# Altium PCB LED7SEG_1.PcbDoc
Units mil, origin at the board's own origin, x right, y up, seen from the top; angles counter-clockwise.
Board outline 820 x 2400 mil, 2 copper layers (Top Layer, Bottom Layer); 18 components, 41 nets, 102 pads, 29 vias.
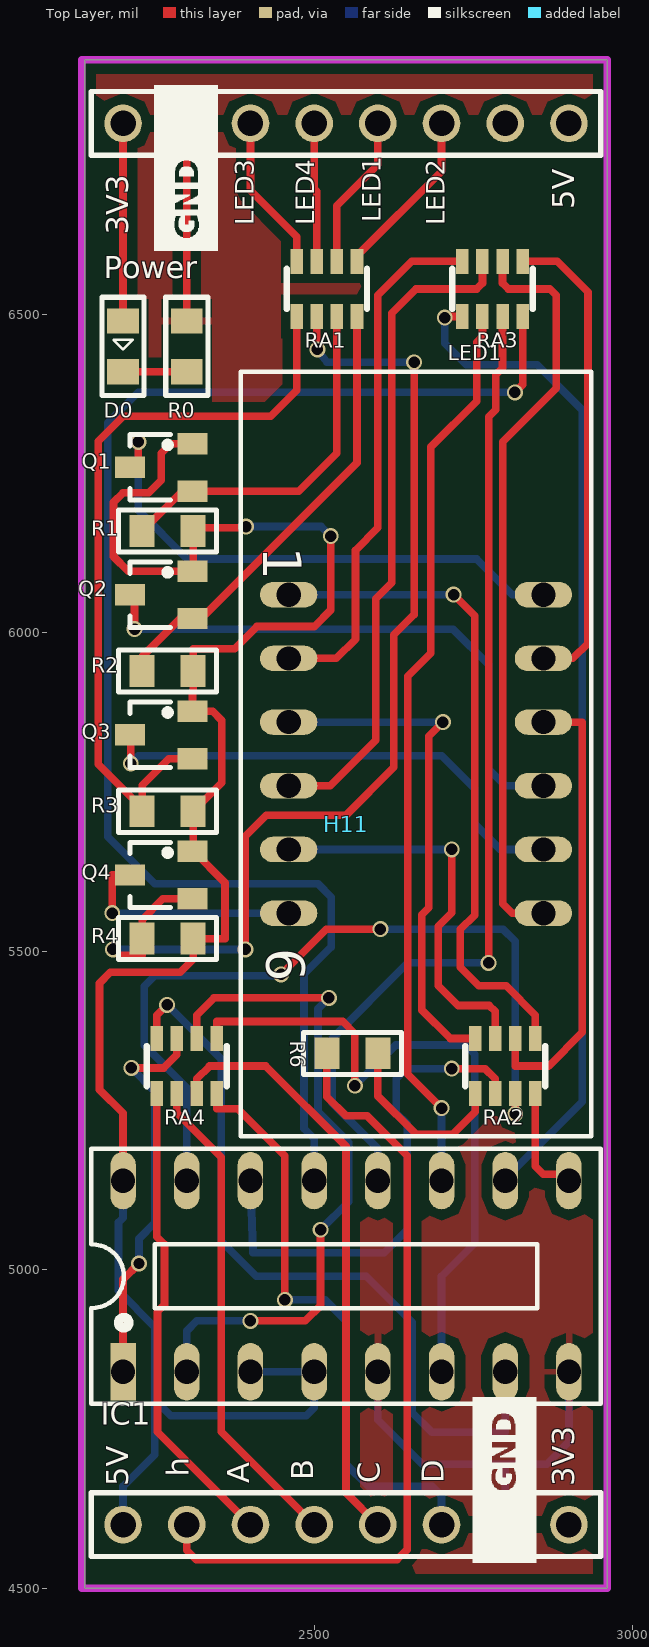
[diagram p0: Top Layer view]
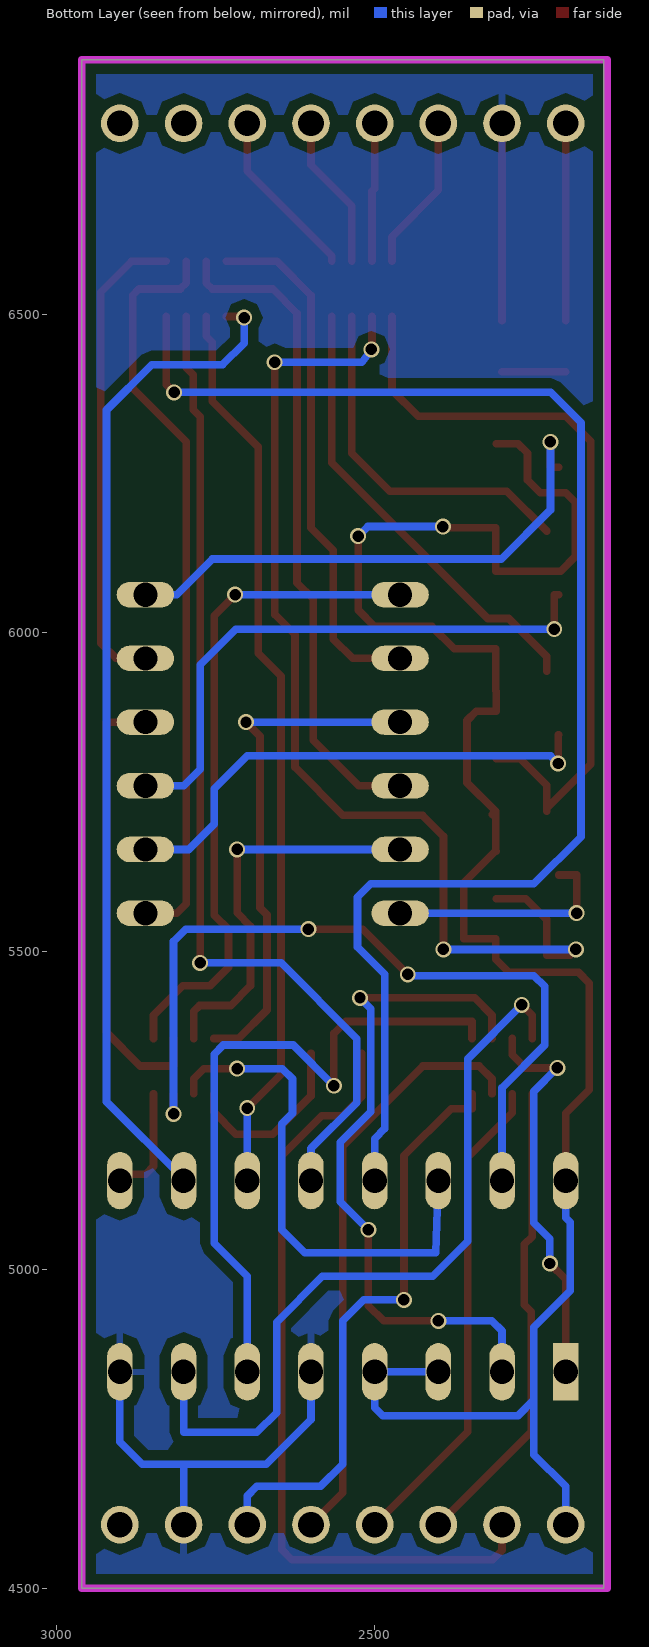
[diagram p1: Bottom Layer view, seen from below]
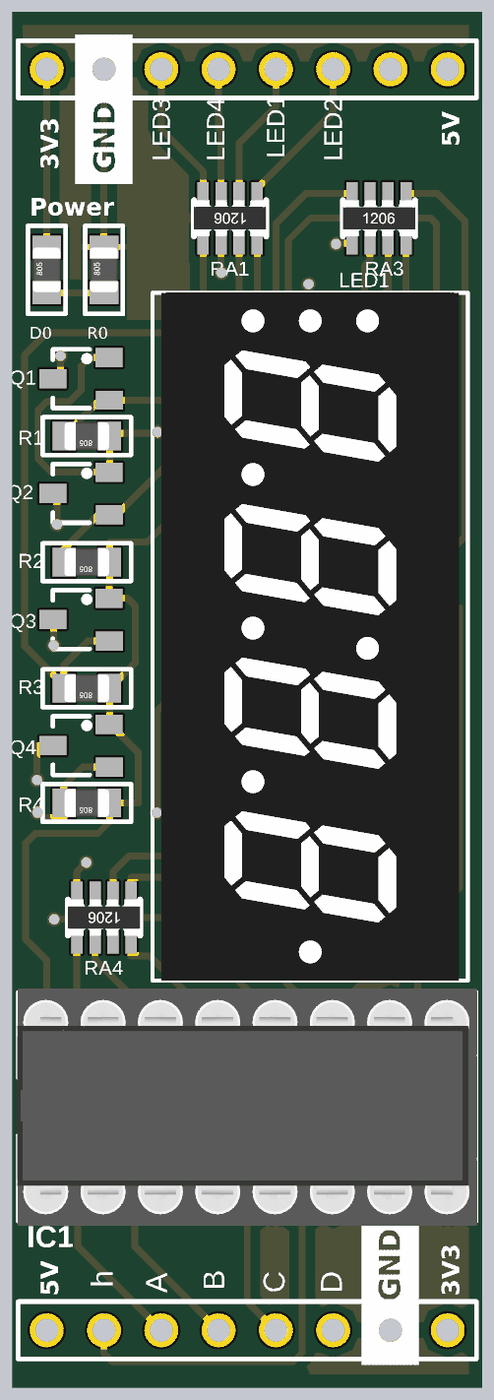
[diagram p2: 3D render of the assembled board from above, using the file's embedded part models]

## Layer stack, top to bottom
Top Layer: signal copper 1.4
Dielectric: dielectric 12.6, FR-4, Dk 4.8
Bottom Layer: signal copper 1.4

## Board outline
2140,4500 2140,6900 2960,6900 2960,4500

## Design rules (kind name [scope] priority, off if disabled: settings)
Clearance [InPolygon] p1: gap=15
Clearance Clearance_1 [All] p2: gap=10
PolygonConnect [All] p1: connectstyle=Relief reliefconductorwidth=10 reliefentries=4 polygonreliefangle="90 Angle"
RoutingVias [All] p1: holewidth=25 width=40 viastyle="Through Hole" minholewidth=28 minwidth=50 maxholewidth=28 maxwidth=50
SilkscreenOverComponentPads SilkToSolderMaskClearance [IsPad] p1: minsilkscreentomaskgap=10
SolderMaskExpansion [All] p1: expansion=4
Width [All] p1: maxlimit=12 minlimit=12 preferedwidth=12
27 further rules are at their usual default settings.

## Components (designator, comment, footprint, x,y, rotation, side; value= is the part's Value field where it differs from the comment)
D0 "LED3" SMD0805LED 2200,6450 r270 top
H11 "MBoard1_BH_DualPorts" MBoard1_BH_DualPorts 2200,6800 r0 top
IC1 "7447" DIP16/W0.3 2200,4840 r0 top
LED1 "LED7SEGx4A" LED7SEGx4A 2460,6060 r270 top
Q1 "A1015" SOT23B 2260,6260 r90 top
Q2 "A1015" SOT23B 2260,6060 r90 top
Q3 "A1015" SOT23B 2260,5840 r90 top
Q4 "A1015" SOT23B 2260,5620 r90 top
R0 "R" SMD0805R 2300,6450 r270 top
R1 "R" SMD0805R 2270,6160 r0 top
R2 "R" SMD0805R 2270,5940 r0 top
R3 "R" SMD0805R 2270,5720 r0 top
R4 "R" SMD0805R 2270,5520 r0 top
R6 "R" SMD0805R 2560,5340 r180 top
RA1 "1k" RA4 2520,6540 r180 top
RA2 "1K" RA4 2800,5320 r0 top
RA3 "1K" RA4 2780,6540 r0 top
RA4 "220" RA4 2300,5320 r180 top

## Footprints (in the part's own frame and the unit in brackets; to place one, negate y for a bottom-side part, rotate by r counter-clockwise, add the part's x,y. Pads: shape width x height; smd on the part's side, far side on the other; paste and mask are expansions set on the pad)
DIP16/W0.3 [mil] "16 PIN, W 300mil, Pin to pin 100mil"
  rect 40x90 hole 38: 1(0,0)
  oval 40x90 hole 38: 2(100,0) 3(200,0) 4(300,0) 5(400,0) 6(500,0) 7(600,0) 8(700,0) 9(700,300) 10(600,300) 11(500,300) 12(400,300) 13(300,300) 14(200,300) 15(100,300) 16(0,300)
  silkscreen extent -50,-50 750,350, body extent -52,-57 752,356, height 299
LED7SEGx4A [mil] "DIP 12 Leads; Body 32x 15 mm; Pitch 0.5 mm"
  oval 40x90 hole 38: 1(0,0) 2(100,0) 3(200,0) 4(300,0) 5(400,0) 6(500,0) 7(500,400) 8(400,400) 9(300,400) 10(200,400) 11(100,400) 12(0,400)
  silkscreen extent -350,-75 850,475, body extent -351,-60 850,460, height 532
MBoard1_BH_DualPorts [mm]
  round 1.5 hole 1.02: 1(0,0) 2(2.54,0) 3(5.08,0) 4(7.62,0) 5(10.16,0) 6(12.7,0) 7(15.24,0) 8(17.78,0) 9(17.78,-55.88) 10(15.24,-55.88) 11(12.7,-55.88) 12(10.16,-55.88) 13(7.62,-55.88) 14(5.08,-55.88) 15(2.54,-55.88) 16(0,-55.88)
  silkscreen extent -1.27,-57.15 19.05,1.27, body extent -1.27,-57.15 19.05,1.27, height 8
RA4 [mm] "Resistor Array (0603x4) form TME"
  rect 0.5x1 smd: 1(-1.2,-1.1) 2(-1.2,1.1) 3(-0.4,-1.1) 4(-0.4,1.1) 5(0.4,-1.1) 6(0.4,1.1) 7(1.2,-1.1) 8(1.2,1.1)
  silkscreen extent -1.6,-0.8 1.6,0.8, body extent -1.6,-0.8 1.6,0.8, height 0.5
SMD0805LED [mil] "Chip LED, Body 2.0 x 1.3 mm (LxW typ)"
  rect 39.37x50 smd: 1(-40,0) 2(40,0)
  silkscreen extent -77,-33 77,33, body extent -39,-25 39,25, height 31
SMD0805R [mil] "Chip Resistor; Body 2.0 x 1.3 mm (LxW typ)"
  rect 39.37x50 smd: 1(-40,0) 2(40,0)
  silkscreen extent -77,-33 77,33, body extent -39,-25 39,25, height 31
SOT23B [mm] "SOT 23B"
  rect 0.85x1.2 smd: 1(0.94,-1.245) 2(0,1.25) 3(-0.95,-1.25)
  silkscreen extent -1.3,-0.38 1.3,1.25, body extent -1.3,-0.38 1.3,1.25, height 1.27

## Part data
D0: library part LEDSMD, "LED SMD"
IC1: "BCD to 7-Segment Decoder/Driver"
LED1: "0.36''"
Q1 Q2 Q3 Q4: "PNP 600mW, ECB"
R0 R1 R2 R3 R4 R6: "RES_08"
RA1 RA2 RA3 RA4: library part RA4

## Via types
v1: diameter 25, hole 18, Top Layer to Bottom Layer, tented both sides, 29 vias

## Nets (pads, with @x,y where several pads share a name; then routed paths per layer and width w, separated by ;. In a path a pad name is that pad's centre, name@x,y a point inside that pad or via, vN(x,y) a via of type N, cw(c..) or ccw(c..) an arc to the next point about the centre after c; other vN are vias at no path point)
3V3: D0.1 H11.1 | length 310
  Top Layer w12: D0.1 H11.1
5V: H11.16 IC1.3 IC1.4 IC1.16 Q1.1 Q2.1 Q3.1 Q4.1 R1.2 R2.2 R3.2 R4.2 | length 3175
  Top Layer w12: IC1.16 2200,5246 2163,5283 2163,5450 2180,5467 2289.5,5467 2310,5487.5 R4.2 2360,5520 2360,5608 Q4.1@2310,5658 ; Q4.1 Q4.1@2310,5658 ; Q1.1 2275,6297 2260,6282 2260,6240 2240,6220 2200,6220 2185,6205 2185,6120 2208,6097 Q2.1 2310,6097 R1.2 2310,6165 2391,6165 v1(2393,6167) ; R3.2@2315,5715 R3.2 ; v1(2526,6152) 2526,6036 2500,6010 2410,6010 2375,5975 2310,5975 R2.2 2310,5909 2309,5908 Q3.1 2340.5,5877 2355,5862.5 2355,5765 R3.2 ; Q4.1@2310,5658 R3.2
  Bottom Layer w12: H11.16 2200,4660 2250,4710 2250,4796 ; IC1.16 2200,5082.09 2192.91,5075 2192.91,4967.09 2250,4910 2250,4796 ; v1(2393,6167) 2511,6167 v1(2526,6152) ; IC1.3 IC1.4 2500,4783.5 2487.5,4771 2275,4771 2250,4796
GND: H11.2 H11.10 IC1.5 IC1.8 R0.1 | length 933.5
  Top Layer w12: R0.1 H11.2
  Bottom Layer w12: IC1.5 2600,4765 2670,4695 2800,4695 ; H11.10 2800,4695 ; IC1.8 2900,4730 2865,4695 2800,4695
NetD0_2: D0.2 R0.2 | length 100
  Top Layer w12: D0.2 R0.2
NetH11_3: H11.3 RA1.7 | length 246.8
  Top Layer w12: H11.3 2400,6695 2472.76,6622.24 RA1.7
NetH11_4: H11.4 RA1.5 | length 218.5
  Top Layer w12: H11.4 2500,6697.5 2504.25,6693.25 RA1.5
NetH11_5: H11.5 RA1.3 | length 243.3
  Top Layer w12: RA1.3 2535.75,6670.75 2600,6735 H11.5
NetH11_6: H11.6 RA1.1 | length 271.7
  Top Layer w12: RA1.1 2567.24,6592.24 2700,6725 H11.6
NetH11_11: H11.11 RA4.2 | length 937.5
  Top Layer w12: RA4.2 2347.24,5253 2380,5253 2454,5179 v1(2454,4953)
  Bottom Layer w12: v1(2454,4953) 2517,4953 2550,4920 2550,4695 2585,4660 2685,4660 2700,4645 H11.11
NetH11_12: H11.12 RA4.4 | length 932.9
  Top Layer w12: RA4.4 2315.75,5300 2335.75,5320 2424.25,5320 2550,5194.25 2550,4650 H11.12
NetH11_13: H11.13 RA4.6 | length 766.1
  Top Layer w12: RA4.6 2284.25,5246.75 2354,5177 2354,4746 H11.13
NetH11_14: H11.14 RA4.8 | length 746.8
  Top Layer w12: RA4.8 2252.76,5052.24 2265,5040 2265,4945 2254,4934 2254,4746 H11.14
NetH11_15: H11.15 R6.2 | length 1249.4
  Top Layer w12: H11.15 2300,4560 2315,4545 2630,4545 2646,4561 2646,5179 2583,5242 2550,5242 2520,5272 R6.2
NetIC1_1: IC1.1 RA4.5 | length 618.6
  Top Layer w12: IC1.1 2200,4985 v1(2225,5010) ; v1(2213,5317) 2263.75,5317 2284.25,5337.5 RA4.5
  Bottom Layer w12: v1(2213,5317) 2250,5280 2250,5074 2225,5049 v1(2225,5010)
NetIC1_2: IC1.2 RA4.3 | length 1074
  Top Layer w12: RA4.3 2315.75,5400 2342.85,5427.1 v1(2523,5427.1) ; v1(2400,4920) 2486,4920 2510,4944 v1(2510,5063)
  Bottom Layer w12: IC1.2 2300,4904 2316,4920 v1(2400,4920) ; v1(2510,5063) 2554,5107 2554,5200 2506,5248 2506,5410.1 v1(2523,5427.1)
NetIC1_6: IC1.6 RA4.1 | length 1073.9
  Top Layer w12: RA4.1 2347.24,5390 2545,5390 2564,5371 v1(2564,5289)
  Bottom Layer w12: v1(2564,5289) 2628,5353 2737.5,5353 2752,5338.5 2752,5042 2700,4990 IC1.6
NetIC1_7: IC1.7 RA4.7 | length 1214.1
  Top Layer w12: RA4.7 2252.76,5399.67 v1(2269.08,5416)
  Bottom Layer w12: v1(2269.08,5416) 2354,5331.08 2354,5045 2409,4990 2582,4990 2654,4918 2654,4776 2685,4745 2800,4745 IC1.7
NetIC1_9: IC1.9 RA2.7 | length 182.1
  Top Layer w12: RA2.7 2847.24,5162.5 2859.74,5150 2900,5150 IC1.9
NetIC1_10: IC1.10 RA3.1 | length 1588.1
  Top Layer w12: v1(2705,6495) 2706.69,6496.69 RA3.1
  Bottom Layer w12: v1(2705,6495) 2705,6455 2739,6421 2850,6421 2921,6350 2921,5264.03 2800,5143.03 IC1.10
NetIC1_11: IC1.11 RA3.3 | length 1427.2
  Top Layer w12: v1(2700,5254) 2647,5307 2647,5932 2683,5968 2683,6291.89 2755,6363.89 2755,6456.55 2764.25,6465.8 RA3.3
  Bottom Layer w12: IC1.11 v1(2700,5254)
NetIC1_12: IC1.12 RA3.5 | length 1571.8
  Top Layer w12: v1(2774,5482) 2774,6339.25 2785,6350.25 2785,6405.34 2795.75,6416.09 RA3.5
  Bottom Layer w12: IC1.12 2600,5190.5 2528,5262.5 2528,5363 2647,5482 v1(2774,5482)
NetIC1_13: IC1.13 RA3.7 | length 2292.6
  Top Layer w12: v1(2815,6377.76) 2827.24,6390 RA3.7
  Bottom Layer w12: IC1.13 2500,5206 2484,5222 2484,5464 2527,5507 2527,5585 2506,5606 2250,5606 2176,5680 2176,6330 2223.76,6377.76 v1(2815,6377.76)
NetIC1_14: IC1.14 RA2.3 | length 805.8
  Top Layer w12: v1(2716,5316) 2768.25,5316 2784.25,5300 RA2.3
  Bottom Layer w12: IC1.14 2404,5027 2610,5027 2646,5063 2646,5229 2629,5246 2629,5300 2645,5316 v1(2716,5316)
NetIC1_15: IC1.15 RA2.5 | length 1263.2
  Top Layer w12: v1(2448,5464) 2519,5535 v1(2604,5535) ; v1(2815.75,5245) RA2.5
  Bottom Layer w12: IC1.15 2300,5286 2233,5353 2233,5445 2250,5462 2446,5462 v1(2448,5464) ; v1(2604,5535) 2796.5,5535 2815.75,5515.75 v1(2815.75,5245)
NetLED1_1: LED1.1 RA2.8 | length 1052.5
  Top Layer w12: v1(2719,6060) 2752,6027 2752,5557 2729.5,5534.5 2729.5,5475 2758.5,5446 2801.24,5446 2847.24,5400 RA2.8
  Bottom Layer w12: LED1.1 v1(2719,6060)
NetLED1_2: LED1.2 RA3.2 | length 826.5
  Top Layer w12: LED1.2 2534.6,5960 2565,5990.4 2565,6130 2600,6165 2600,6530 2653.31,6583.31 RA3.2
NetLED1_3: LED1.3 RA2.2 | length 809.9
  Top Layer w12: v1(2702,5860) 2680,5838 2680,5568.5 2669,5557.5 2669,5408 2713.69,5363.31 RA2.2
  Bottom Layer w12: LED1.3 v1(2702,5860)
NetLED1_4: LED1.4 RA3.4 | length 1043.1
  Top Layer w12: LED1.4 2525,5760 2596.6,5831.6 2596.6,6053.6 2622,6079 2622,6502 2660,6540 2755,6540 2764.25,6549.25 RA3.4
NetLED1_5: LED1.5 RA2.4 | length 627.1
  Top Layer w12: v1(2716,5660) 2716,5560.5 2695,5539.5 2695,5446 2726,5415 2775,5415 2784.25,5405.75 RA2.4
  Bottom Layer w12: LED1.5 v1(2716,5660)
NetLED1_6: LED1.6 Q4.2 | length 364.8
  Top Layer w12: v1(2183,5560) 2183,5620 Q4.2
  Bottom Layer w12: v1(2183,5560) LED1.6
NetLED1_7: LED1.7 RA3.6 | length 1186.4
  Top Layer w12: RA3.6 2795.75,6549.13 2804.88,6540 2870,6540 2880,6530 2880,6384.32 2796,6300.32 2796,5575 2811,5560 LED1.7
NetLED1_8: LED1.8 Q3.2 | length 792.3
  Top Layer w12: Q3.2 2212,5840 v1(2212,5795)
  Bottom Layer w12: v1(2212,5795) 2224,5807 2700,5807 2752,5755 2752,5700 2792,5660 LED1.8
NetLED1_9: LED1.9 Q2.2 | length 901.2
  Top Layer w12: Q2.2 2218,6060 v1(2218,6006)
  Bottom Layer w12: v1(2218,6006) 2718,6006 2774,5950 2774,5786 2800,5760 LED1.9
NetLED1_10: LED1.10 RA2.6 | length 718.5
  Top Layer w12: RA2.6 2815.75,5320 2868,5320 2921,5373 2921,5860 LED1.10
NetLED1_11: LED1.11 RA3.8 | length 753.7
  Top Layer w12: RA3.8 2881.69,6583.31 2930,6535 2930,5984 2906,5960 LED1.11
NetLED1_12: LED1.12 Q1.2 | length 851.3
  Top Layer w12: Q1.2 2224,6260 v1(2224,6300)
  Bottom Layer w12: v1(2224,6300) 2224,6193 2301,6116 2755,6116 2811,6060 LED1.12
NetQ1_3: Q1.3 R1.1 RA1.4 | length 570.8
  Top Layer w12: R1.1 2292.6,6222.6 Q1.3 2476,6222.6 2535.75,6282.35 RA1.4
NetQ2_3: Q2.3 R2.1 RA1.2 | length 715.7
  Top Layer w12: R2.1 2230,5963 2289.6,6022.6 Q2.3 2322.6,6022.6 2567.24,6267.24 RA1.2
NetQ3_3: Q3.3 R3.1 RA1.8 | length 1202.6
  Top Layer w12: R3.1 R3.1@2230,5725 ; Q3.3 2271.6,5802.6 2230,5761 R3.1@2230,5725 ; RA1.8 2472.76,6381 2431.76,6340 2200,6340 2161,6301 2161,5794 R3.1@2230,5725
NetQ4_3: Q4.3 R4.1 RA1.6 | length 1725.4
  Top Layer w12: v1(2184,5503) 2193,5494 2230,5494 R4.1 2230,5550 2262.6,5582.6 Q4.3 ; v1(2392,5503) 2392,5681 2425,5714 2550,5714 2625,5789 2625,5997 2657,6029 v1(2657,6425) ; RA1.6 2504.25,6445.75 v1(2505,6445)
  Bottom Layer w12: v1(2184,5503) v1(2392,5503) ; v1(2505,6445) 2520,6425 v1(2657,6425)
NetR6_1: R6.1 RA2.1 | length 287.8
  Top Layer w12: R6.1 2600,5273 2660,5213 2717.76,5213 2752.76,5248 RA2.1
pads on no net: H11.7 H11.8 H11.9

## Polygon pours and split planes (outlines as drawn)
GND on Top Layer "Bottom Layer-No Net" (solid, remove dead copper, pour order 2): 2135,6900 2135,4505 2135,4500 2960,4500 2960,6900
GND on Bottom Layer "Bottom Layer-No Net" (solid, remove dead copper, pour order 4): 2960,4500 2960,6895 2955,6900 2960,6900 2135,6900 2135,4500

## Keep-outs
Keep-Out Layer:
  lines w12: 2135,4500 2960,4500 2960,6900 2135,6900 2135,4500

## Silkscreen, mask and mechanical layers (free items; w line width, h text height)
Top Overlay:
  drawing of 606 lines, arcs and shapes, not listed
  text "5V" at 2920,6665 h60 r90
  text "LED1" at 2615,6645 h50 r90
  text "LED3" at 2415,6640 h50 r90
  text "LED4" at 2510,6640 h50 r90
  text "LED2" at 2715,6640 h50 r90
  text "3V3" at 2220,6625 h60 r90
  text "Power" at 2170,6545 h60
  text "h" at 2315,4675 h60 r90
  text "B" at 2510,4670 h60 r90
  text "A" at 2410,4665 h60 r90
  text "C" at 2615,4665 h60 r90
  text "D" at 2715,4665 h60 r90
  text "5V" at 2220,4660 h60 r90
  text "3V3" at 2920,4660 h60 r90
Drill Drawing:
  text ".LEGEND" at 7200,3200 h40
  text "Drill Drawing." at 7200,3100 h40

## Dimensions
2135,4500 to 2960,4500 on Mechanical 1
2135,4500 to 2135,6900 on Mechanical 1

## Text inside footprints (layer, text, board x,y; h text height)
LED1: Top Overlay "6" at 2425,5505 h60 r270; Top Overlay "1" at 2420,6135 h60 r270